# Altium PCB Snow LanteRn.PcbDoc
Units mm, origin at the board's own origin, x right, y up, seen from the top; angles counter-clockwise.
Board outline 48 x 65.97 mm, 2 copper layers (Top Layer, Bottom Side), stack 1.106 mm thick; 27 components, 19 nets, 55 pads, 0 vias.
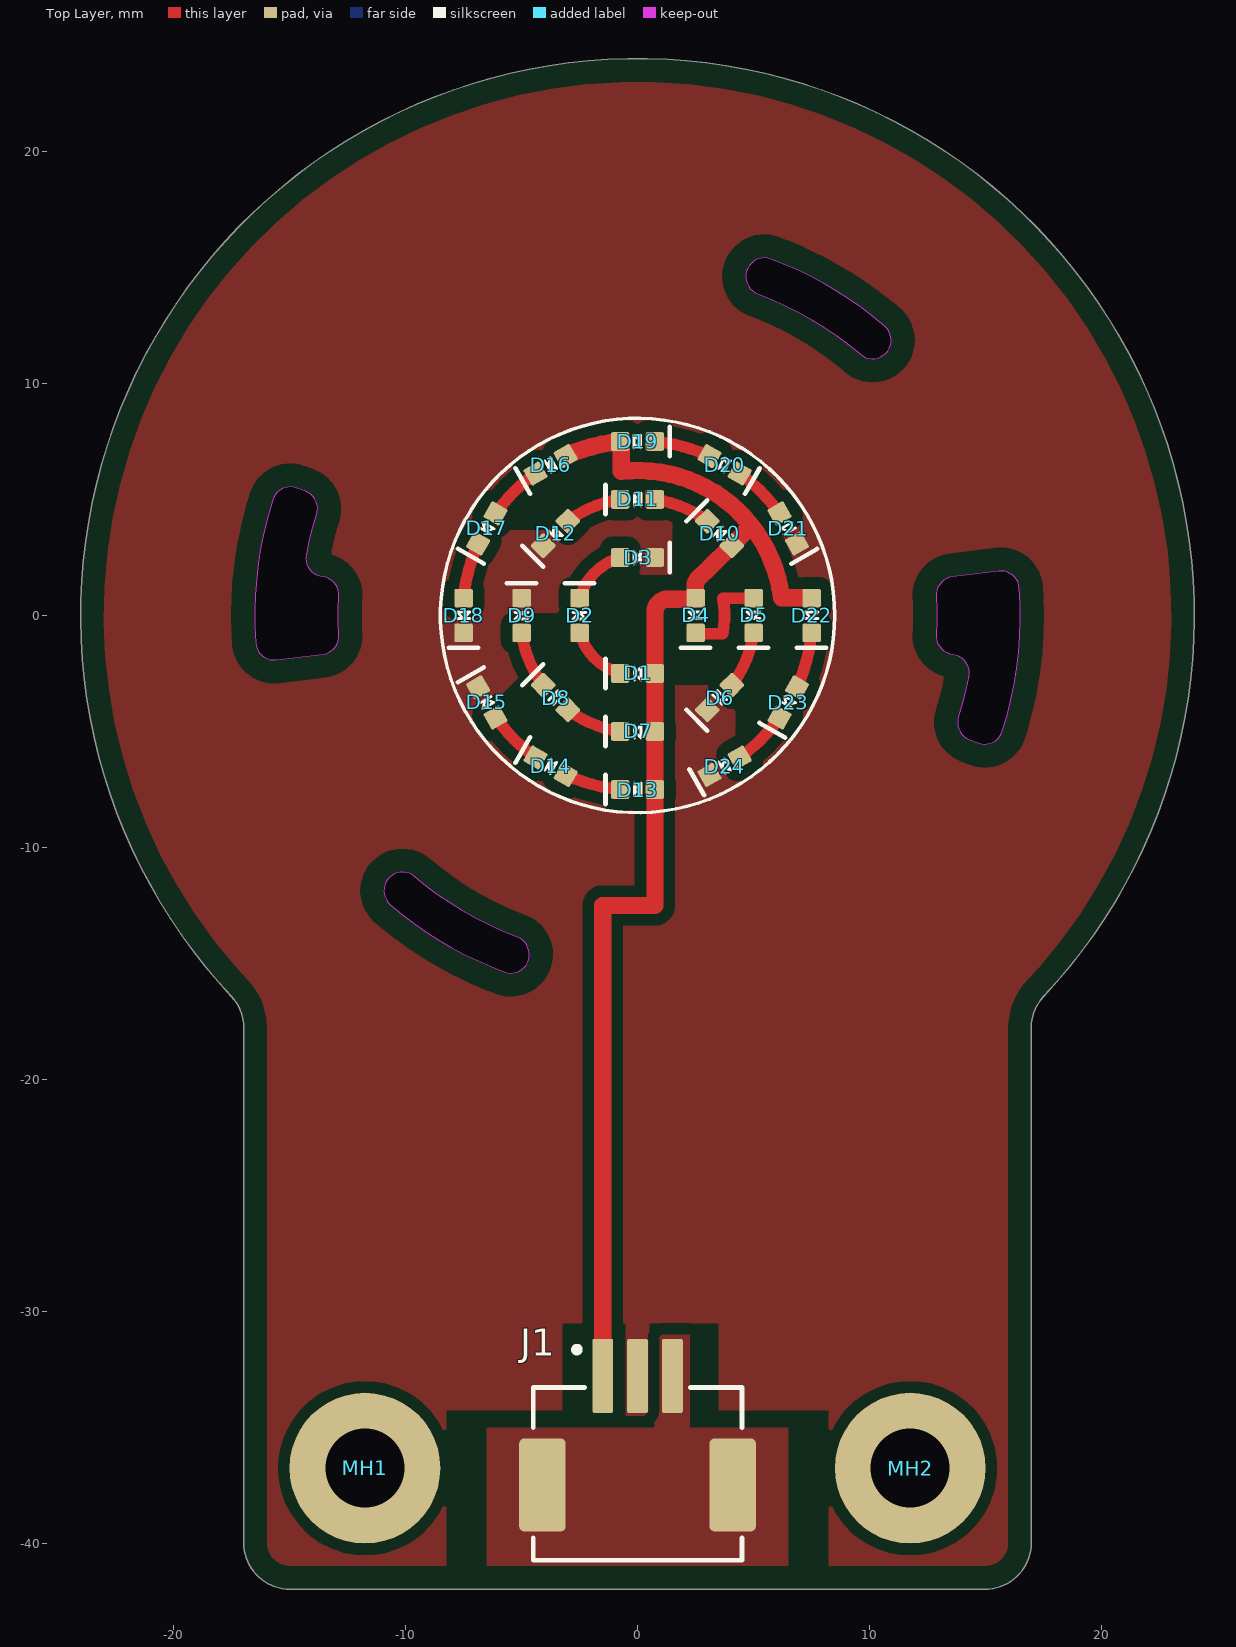
[diagram p0: Top Layer view]
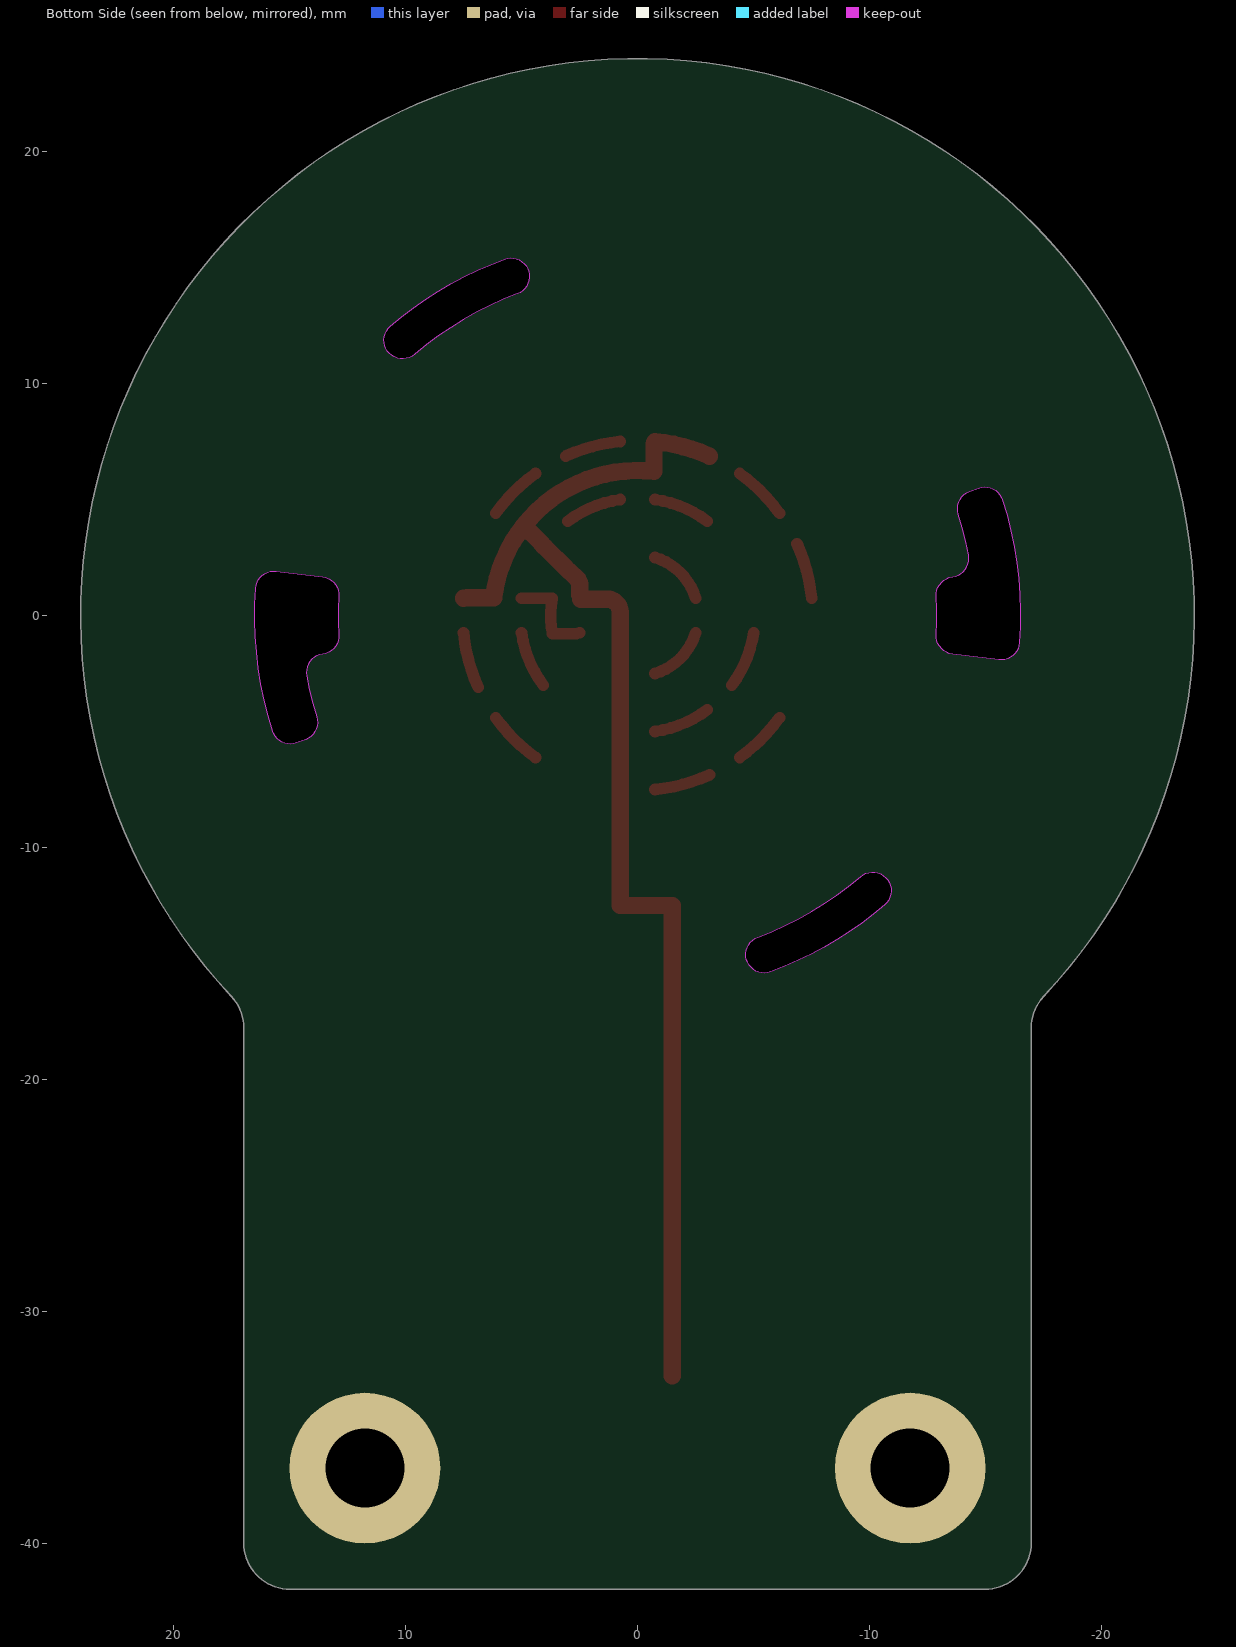
[diagram p1: Bottom Side view, seen from below]
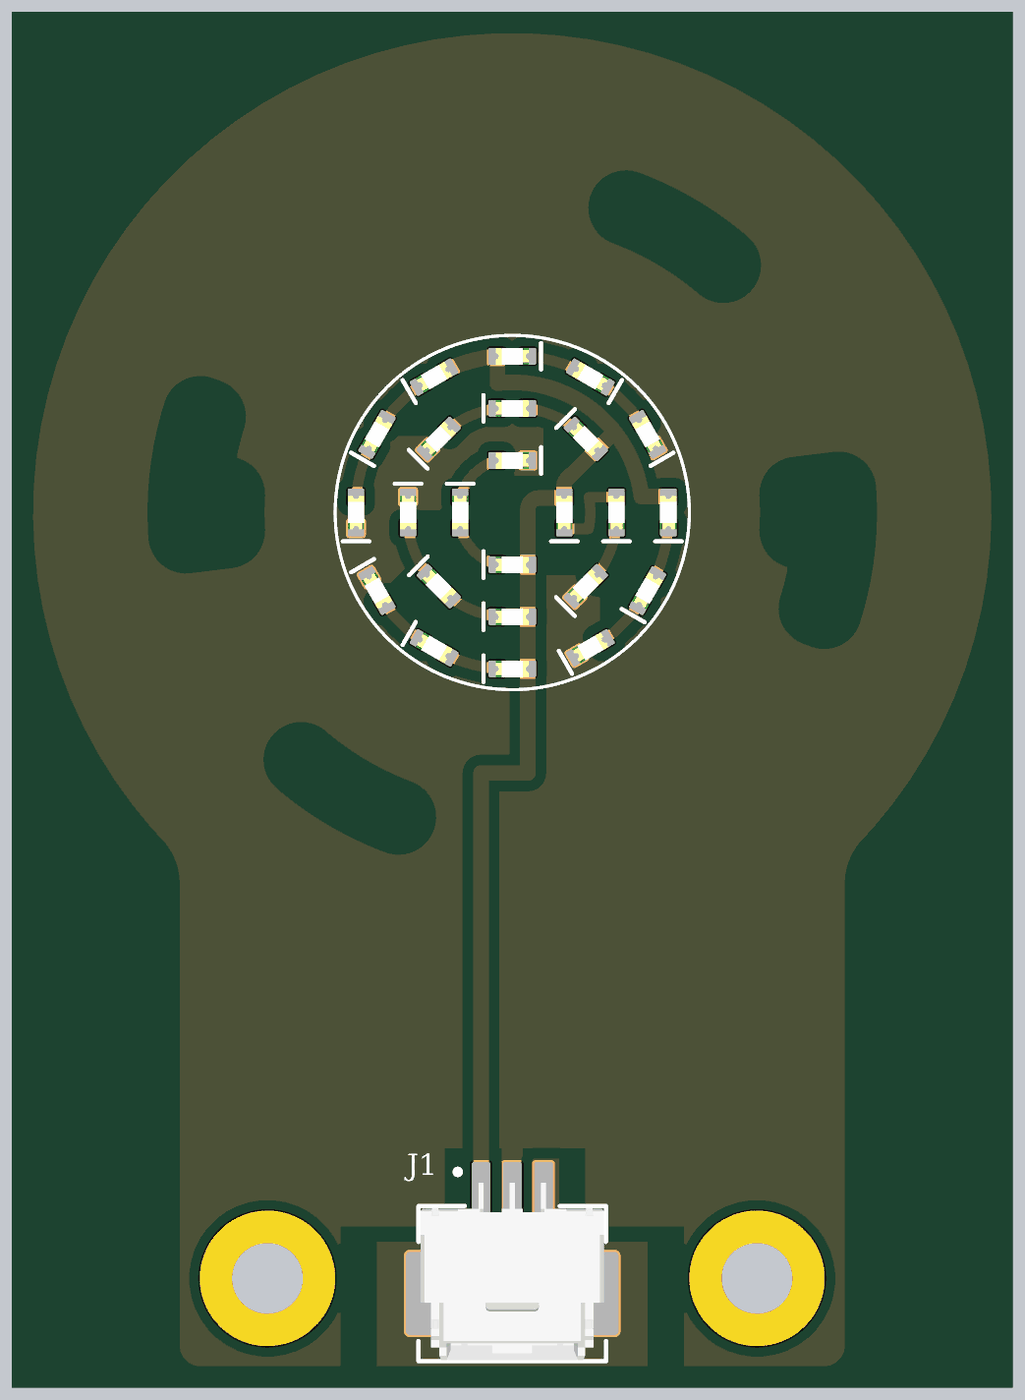
[diagram p2: 3D render of the assembled board from above, using the file's embedded part models]

## Layer stack, top to bottom
Top Solder: solder mask 0.0102, Solder Resist, Dk 3.5
Top Layer: signal copper 0.0356
Dielectric 1: core 0.1, Composite dielectric, Dk 4.5
Aluminum: core 0.97, Core-009, Dk 4.5
Bottom Side: signal copper (thickness not stored)

## Board outline
-16.971,-39.97 -16.971,-17.779 ccw(c-18.97,-17.779) -17.511,-16.412 cw(c0,0) 17.511,-16.412 ccw(c18.971,-17.779) 16.971,-17.779 16.971,-39.97 cw(c14.971,-39.97) 14.971,-41.97 -14.971,-41.97 cw(c-14.971,-39.97)
cut-out: 5.183,13.863 cw(c0,0) 9.612,11.254 ccw(c10.131,11.863) 10.651,12.471 ccw(c0,0) 5.743,15.362 ccw(c5.463,14.612)
cut-out: 12.874,-0.822 ccw(c13.672,-0.872) 13.575,-1.667 cw(c13.477,-2.461) 14.264,-2.604 cw(c0,0) 13.829,-4.361 ccw(c14.592,-4.601) 14.311,-5.351 14.687,-5.491 ccw(c14.967,-4.742) 15.729,-4.983 ccw(c0,0) 16.458,1.174 ccw(c15.66,1.117) 15.563,1.911 13.575,1.667 ccw(c13.672,0.873) 12.874,0.822 cw(c0,0)
cut-out: -16.458,-1.173 ccw(c-15.66,-1.117) -15.563,-1.911 -13.575,-1.667 ccw(c-13.672,-0.872) -12.874,-0.822 cw(c0,0) -12.874,0.822 ccw(c-13.672,0.873) -13.575,1.667 cw(c-13.477,2.461) -14.264,2.605 cw(c0,0) -13.829,4.361 ccw(c-14.592,4.602) -14.311,5.351 -14.687,5.491 ccw(c-14.967,4.742) -15.729,4.984 ccw(c0,0)
cut-out: -10.651,-12.47 ccw(c0,0) -5.743,-15.361 ccw(c-5.463,-14.612) -5.183,-13.863 cw(c0,0) -9.612,-11.254 ccw(c-10.131,-11.862)

## Design rules (kind name [scope] priority, off if disabled: settings)
BoardOutlineClearance [All] p1: gap=1 ignorepadtopadclearanceinfootprint=FALSE
Clearance [All] p1: gap=0.5 ignorepadtopadclearanceinfootprint=FALSE except(0.15: Arc-Arc Arc-Track Arc-SMDPad Arc-THPad Arc-Via Arc-Text Track-Track Track-SMDPad Track-THPad Track-Via Track-Text SMDPad-SMDPad SMDPad-THPad SMDPad-Via SMDPad-Text THPad-THPad THPad-Via THPad-Text Via-Via Via-Text Text-Text; 0.25: Arc-Hole Track-Hole SMDPad-Hole THPad-Hole Via-Hole Text-Hole)
ComponentClearance [All] p1: gap=0.127 collisioncheckmode=3 verticalgap=0.127 showdistances=TRUE
DiffPairsRouting [All] p1: maxlimit=0.254 minlimit=0.127 mostfreqgap=0.127 toplayer_minwidth=0.127 toplayer_maxwidth=25.4 toplayer_prefwidth=0.127 bottomlayer_minwidth=0.127 bottomlayer_maxwidth=25.4 bottomlayer_prefwidth=0.127 substack1={27A5C15A-25FC-4883-8667-F89D7865D495} toplayer_{27a5c15a-25fc-4883-8667-f89d7865d495}_minwidth=0.381 toplayer_{27a5c15a-25fc-4883-8667-f89d7865d495}_maxwidth=0.381 toplayer_{27a5c15a-25fc-4883-8667-f89d7865d495}_prefwidth=0.381 bottomlayer_{27a5c15a-25fc-4883-8667-f89d7865d495}_minwidth=0.381 bottomlayer_{27a5c15a-25fc-4883-8667-f89d7865d495}_maxwidth=0.381 bottomlayer_{27a5c15a-25fc-4883-8667-f89d7865d495}_prefwidth=0.381 maxuncoupledlength=12.7
Height [All] p1: minheight=0 maxheight=1816.048 prefheight=12.7
HoleSize [All] p1: absolutevalues=TRUE maxlimit=6.3 minlimit=1.6 maxpercent=80.000 minpercent=20.000
HoleToHoleClearance [All] p1: gap=0.25 allowstackedmicrovias=FALSE
MinimumAnnularRing [All] p1: minimumring=0.076
MinimumSolderMaskSliver [All] p1: minsoldermaskwidth=0
PlaneClearance [All] p1: clearance=0.127
PlaneConnect PlaneConnectPowerPads [InPadClass('PowerPads')] p1: planeconnectstyle=Direct reliefexpansion=0.508 reliefentries=4 reliefconductorwidth=0.254 reliefairgap=0.254
PlaneConnect [All] p2: pad.planeconnectstyle=Relief pad.reliefexpansion=0.3 pad.reliefentries=4 pad.reliefconductorwidth=0.127 pad.reliefairgap=0.127 via.planeconnectstyle=Direct via.reliefexpansion=0.3 via.reliefentries=4 via.reliefconductorwidth=0.127 via.reliefairgap=0.127
PolygonConnect PolygonConnectPowerPads [All vs (InPadClass('PowerPads'))] p1: connectstyle=Direct reliefconductorwidth=0.254 reliefentries=4 polygonreliefangle="90 Angle" airgapwidth=0.254
PolygonConnect [All] p2: thpad.connectstyle=Relief thpad.reliefconductorwidth=0.127 thpad.reliefentries=4 thpad.polygonreliefangle="90 Angle" thpad.airgapwidth=0.127 smdpad.connectstyle=Direct smdpad.reliefconductorwidth=0.127 smdpad.reliefentries=4 smdpad.polygonreliefangle="90 Angle" smdpad.airgapwidth=0.127 via.connectstyle=Direct via.reliefconductorwidth=0.127 via.reliefentries=4 via.polygonreliefangle="90 Angle" via.airgapwidth=0.127
RoutingVias [All] p1: holewidth=0.3 width=0.6 viastyle="Through Hole" minholewidth=0.3 minwidth=0.6 maxholewidth=0.6 maxwidth=6.6
SilkToSilkClearance [All] p1: silktosilkclearance=0
SilkToSolderMaskClearance [IsPad] p1: minsilkscreentomaskgap=0.127 clearancetoexposedcopper=TRUE
SolderMaskExpansion [All] p1: expansion=0.075 istentingtop=FALSE
SupplyNets "Schematic Supply Nets_1" [InNet('GND')] p1: voltage=0.000
SupplyNets "Schematic Supply Nets" [InNet('12V')] p2: voltage=0.000
Width [All] p1: maxlimit=25.4 minlimit=0.127 preferedwidth=0.127 substack1={27A5C15A-25FC-4883-8667-F89D7865D495} toplayer_{27a5c15a-25fc-4883-8667-f89d7865d495}_minwidth=0.1 toplayer_{27a5c15a-25fc-4883-8667-f89d7865d495}_maxwidth=2.54 toplayer_{27a5c15a-25fc-4883-8667-f89d7865d495}_prefwidth=0.3 bottomlayer_{27a5c15a-25fc-4883-8667-f89d7865d495}_minwidth=0.254 bottomlayer_{27a5c15a-25fc-4883-8667-f89d7865d495}_maxwidth=0.254 bottomlayer_{27a5c15a-25fc-4883-8667-f89d7865d495}_prefwidth=0.254 minimp=50.000000 maximp=50.000000 favimp=50.000000
20 further rules are at their usual default settings.

## Components (designator, comment, footprint, x,y, rotation, side; value= is the part's Value field where it differs from the comment)
D1 "LED_WHITE_0603" LED_0603 0,-2.5 r180 top
D2 "LED_WHITE_0603" LED_0603 -2.5,0 r90 top
D3 "LED_WHITE_0603" LED_0603 0,2.5 r0 top
D4 "LED_WHITE_0603" LED_0603 2.5,0 r270 top
D5 "LED_WHITE_0603" LED_0603 5,0 r270 top
D6 "LED_WHITE_0603" LED_0603 3.536,-3.536 r225 top
D7 "LED_WHITE_0603" LED_0603 0,-5 r180 top
D8 "LED_WHITE_0603" LED_0603 -3.536,-3.536 r135 top
D9 "LED_WHITE_0603" LED_0603 -5,0 r90 top
D10 "LED_WHITE_0603" LED_0603 3.536,3.536 r135 top
D11 "LED_WHITE_0603" LED_0603 0,5 r180 top
D12 "LED_WHITE_0603" LED_0603 -3.536,3.536 r225 top
D13 "LED_WHITE_0603" LED_0603 0,-7.5 r180 top
D14 "LED_WHITE_0603" LED_0603 -3.75,-6.495 r150 top
D15 "LED_WHITE_0603" LED_0603 -6.495,-3.75 r120 top
D16 "LED_WHITE_0603" LED_0603 -3.75,6.495 r210 top
D17 "LED_WHITE_0603" LED_0603 -6.495,3.75 r240 top
D18 "LED_WHITE_0603" LED_0603 -7.5,0 r270 top
D19 "LED_WHITE_0603" LED_0603 0,7.5 r0 top
D20 "LED_WHITE_0603" LED_0603 3.75,6.495 r330 top
D21 "LED_WHITE_0603" LED_0603 6.495,3.75 r300 top
D22 "LED_WHITE_0603" LED_0603 7.5,0 r270 top
D23 "LED_WHITE_0603" LED_0603 6.495,-3.75 r240 top
D24 "LED_WHITE_0603" LED_0603 3.75,-6.495 r210 top
J1 "CON_3M_SM_RA" MOLEX-5025850370 0,-37 r0 top
MH1 "MOUNTING_HOLE_M3" MOUNTING_HOLE_3mm -11.75,-36.75 r0 top
MH2 "MOUNTING_HOLE_M3" MOUNTING_HOLE_3mm 11.75,-36.75 r0 top

## Footprints (in the part's own frame and the unit in brackets; to place one, negate y for a bottom-side part, rotate by r counter-clockwise, add the part's x,y. Pads: shape width x height; smd on the part's side, far side on the other; paste and mask are expansions set on the pad)
LED_0603 [mm] "SMD, 2-Leads, Body 2x1.25mm"
  rrect20% 0.8x0.8 smd: 1(0.75,0) 2(-0.75,0)
  silkscreen extent -0.15,-0.63 1.38,0.64, body extent -0.8,-0.4 0.8,0.4, height 0.6
MOLEX-5025850370 [mm]
  rrect20% 2x4 smd paste+0 mask+0.1: 0(-4.1,-0.475) 0(4.1,-0.475)
  rrect20% 0.9x3.2 smd paste+0 mask+0.1: 1(-1.5,4.225) 2(0,4.225) 3(1.5,4.225)
  silkscreen extent -4.5,-3.72 4.5,5.48, body extent -4.4,-3.67 4.4,4.83, height 6.4
MOUNTING_HOLE_3mm [mm] "3mm Hole"
  round 6.5 hole 3.4: 0(0,0)

## Part data
D1 D2 D3 D4 D5 D6 D7 D8 D9 D10 D11 D12 D13 D14 D15 D16 D17 D18 D19 D20 D21 D22 D23 D24: "LED WHITE FROSTED-LENS 0603 SMD", Forward Voltage Drop=3.5V, Manufacturer 1=MEIHUA, Manufacturer Part Number 1=MHP1016UWDT, Package/Footprint=0603, Supplier Part Number 1=C409776, Mounting Type=SMD, Supplier 1=LCSC
J1: "CONN RCPT 3POS 0.059 TIN SMD R/A", Current Rating=2A, Manufacturer 1=Molex, Manufacturer Part Number 1=5025850370, Package/Footprint=SMD, Supplier Part Number 1=WM12831CT-ND, Voltage Rating=100V, Family=CLIK-Mate, Mounting Type=SMD, Orientation="Right Angle", Pitch=1.5mm, Supplier 1=Digi-Key

## Nets (pads, with @x,y where several pads share a name; then routed paths per layer and width w, separated by ;. In a path a pad name is that pad's centre, name@x,y a point inside that pad or via, vN(x,y) a via of type N, cw(c..) or ccw(c..) an arc to the next point about the centre after c; other vN are vias at no path point)
12V: D1.2 D4.2 D7.2 D10.2 D13.2 D16.2 D19.2 D22.2 J1.1 | length 56.2
  Top Layer w0.75: D16.2 cw(c0,0) D19.2 -0.708,7.35 -0.708,6.21 cw(c0,0) 4.906,3.873 ; J1.1 -1.5,-12.5 0.75,-12.5 D13.2 0.75,-5.15 D7.2 0.75,-4.85 0.75,-3.677 0.75,-2.65 D1.2 0.75,0.15 cw(c1.3,0.15) 1.3,0.7 2.45,0.7 2.46,0.757 2.487,0.9 2.487,1.271 cw(c2.987,1.271) 2.645,1.636 3.12,2.08 3.95,2.909 D10.2 4.158,3.125 4.906,3.873 ; D22.2 7.35,0.762 6.203,0.762 ccw(c0,0) 4.906,3.873
GND: J1.0 J1.3
NetD1_1: D1.1 D2.2 | length 2.6
  Top Layer w0.5: D2.2 ccw(c0,0) D1.1
NetD2_1: D2.1 D3.2 | length 2.6
  Top Layer w0.5: D2.1 cw(c0,0) D3.2
NetD4_1: D4.1 D5.2 | length 4
  Top Layer w0.5: D4.1 2.65,-0.786 3.667,-0.786 ccw(c0,0) 3.677,0.735 4.85,0.735 D5.2
NetD5_1: D5.1 D6.2 | length 2.5
  Top Layer w0.5: D6.2 ccw(c0,0) D5.1
NetD7_1: D7.1 D8.2 | length 2.5
  Top Layer w0.5: D8.2 ccw(c0,0) D7.1
NetD8_1: D8.1 D9.2 | length 2.5
  Top Layer w0.5: D9.2 ccw(c0,0) D8.1
NetD10_1: D10.1 D11.2 | length 2.5
  Top Layer w0.5: D11.2 cw(c0,0) D10.1
NetD11_1: D11.1 D12.2 | length 2.5
  Top Layer w0.5: D12.2 cw(c0,0) D11.1
NetD13_1: D13.1 D14.2 | length 2.4
  Top Layer w0.5: D14.2 ccw(c0,0) D13.1
NetD14_1: D14.1 D15.2 | length 2.4
  Top Layer w0.5: D15.2 ccw(c0,0) D14.1
NetD16_1: D16.1 D17.2 | length 2.4
  Top Layer w0.5: D17.2 cw(c0,0) D16.1
NetD17_1: D17.1 D18.2 | length 2.4
  Top Layer w0.5: D18.2 cw(c0,0) D17.1
NetD19_1: D19.1 D20.2 | length 2.4
  Top Layer w0.5: D19.1 cw(c0,0) D20.2
NetD20_1: D20.1 D21.2 | length 2.4
  Top Layer w0.5: D20.1 cw(c0,0) D21.2
NetD22_1: D22.1 D23.2 | length 2.4
  Top Layer w0.5: D23.2 ccw(c0,0) D22.1
NetD23_1: D23.1 D24.2 | length 2.4
  Top Layer w0.5: D24.2 ccw(c0,0) D23.1
WHITE_LED_CATHODE: D3.1 D6.1 D9.1 D12.1 D15.1 D18.1 D21.1 D24.1 J1.2
pads on no net: MH1.0 MH2.0

## Polygon pours and split planes (outlines as drawn)
WHITE_LED_CATHODE on Top Layer "CATHODE_L01_P002" (solid, pour order 2): -0.5,-30.5 -0.5,-34.5 0.5,-34.5 0.5,-30.5 3.5,-30.5 3.5,-34.25 8.25,-34.25 8.25,-41.97 14.971,-41.97 ccw(c14.971,-39.97) 16.971,-39.97 16.971,-17.779 cw(c18.971,-17.779) 17.511,-16.412 ccw(c0,0) -17.511,-16.412 cw(c-18.97,-17.779) -16.971,-17.779 -16.971,-39.97 ccw(c-14.971,-39.97) -14.971,-41.97 -8.25,-41.97 -8.25,-34.25 -3.25,-34.25 -3.25,-30.5
GND on Top Layer "GND_L01_P-001" (solid, pour order 1): -6.5,-41.97 -6.5,-35 0.75,-35 0.75,-31 2.25,-31 2.25,-35 6.5,-35 6.5,-41.97

## Other copper
Top Layer:
  pour cut-out: 1.5,4.25 0.891,4.859 -1.391,4.859 -2.583,3.667 -5.491,3.667 -5.491,5.009 -3.75,6.75 1.5,6.75 4.25,4 4.25,1.25 7,1.25 7,-3 4.829,-5.171 4.221,-5.171 4.221,-2.971 3.875,-2.625 3.5,-3 1,-3 0,-4 0,-7 -3.25,-7 -5.85,-4.4 -5.85,-3.391 -4.5,-2.041 -4.5,-1.5 -4.454,-1.454 -4.454,0.116 -3.134,0.116 -1.5,1.75 1.5,1.75

## Silkscreen, mask and mechanical layers (free items; w line width, h text height)
Top Overlay:
  circle w0.15: c0,0 r8.5
Mechanical 1:
  lines w0.2: -17.511,-16.412 cw(c0,0) 17.511,-16.412 ; -17.511,-16.412 cw(c-18.971,-17.779) -16.971,-17.779 ; -17.511,-16.412 cw(c0,0) 17.511,-16.412 ; -17.511,-16.412 cw(c-18.971,-17.779) -16.971,-17.779 ; -16.971,-39.97 ccw(c-14.971,-39.97) -14.971,-41.97 ; -16.971,-39.97 ccw(c-14.971,-39.97) -14.971,-41.97 ; -16.971,-39.97 -16.971,-17.779 ; -16.458,-1.173 ccw(c-15.66,-1.117) -15.563,-1.911 ; -16.458,-1.173 cw(c0,0) -15.729,4.984 ; -16.458,-1.173 cw(c0,0) -15.729,4.984 ; -16.458,-1.173 ccw(c-15.66,-1.117) -15.563,-1.911 ; -15.729,4.984 cw(c-14.967,4.742) -14.687,5.491 ; -15.729,4.984 cw(c-14.967,4.742) -14.687,5.491 ; -15.563,-1.911 -13.575,-1.667 ; -15.563,-1.911 -13.575,-1.667 ; -14.971,-41.97 14.971,-41.97 ; -14.971,-41.97 14.971,-41.97 ; -14.687,5.491 -14.311,5.351 ; -14.687,5.491 -14.311,5.351 ; -14.311,5.351 cw(c-14.592,4.602) -13.829,4.361 ; -14.311,5.351 cw(c-14.592,4.602) -13.829,4.361 ; -14.264,2.605 cw(c0,0) -13.829,4.361 ; -14.264,2.605 ccw(c-13.477,2.461) -13.575,1.667 ; -14.264,2.605 cw(c0,0) -13.829,4.361 ; -14.264,2.605 ccw(c-13.477,2.461) -13.575,1.667 ; -13.575,-1.667 ccw(c-13.672,-0.872) -12.874,-0.822 ; -13.575,-1.667 ccw(c-13.672,-0.872) -12.874,-0.822 ; -13.575,1.667 cw(c-13.672,0.873) -12.874,0.822 ; -13.575,1.667 cw(c-13.672,0.873) -12.874,0.822 ; -12.874,-0.822 cw(c0,0) -12.874,0.822 ; -12.874,-0.822 cw(c0,0) -12.874,0.822 ; -10.651,-12.47 ccw(c0,0) -5.743,-15.361 ; -10.651,-12.47 cw(c-10.131,-11.862) -9.612,-11.254 ; -10.651,-12.47 ccw(c0,0) -5.743,-15.361 ; -10.651,-12.47 cw(c-10.131,-11.862) -9.612,-11.254 ; -9.612,-11.254 ccw(c0,0) -5.183,-13.863 ; -9.612,-11.254 ccw(c0,0) -5.183,-13.863 ; -5.743,-15.361 ccw(c-5.463,-14.612) -5.183,-13.863 ; -5.743,-15.361 ccw(c-5.463,-14.612) -5.183,-13.863 ; 5.183,13.863 cw(c0,0) 9.612,11.254 ; 5.183,13.863 cw(c5.463,14.612) 5.743,15.362 ; 5.183,13.863 cw(c0,0) 9.612,11.254 ; 5.183,13.863 cw(c5.463,14.612) 5.743,15.362 ; 5.743,15.362 cw(c0,0) 10.651,12.471 ; 5.743,15.362 cw(c0,0) 10.651,12.471 ; 9.612,11.254 ccw(c10.131,11.863) 10.651,12.471 ; 9.612,11.254 ccw(c10.131,11.863) 10.651,12.471 ; 12.874,-0.822 ccw(c13.672,-0.872) 13.575,-1.667 ; 12.874,-0.822 ccw(c0,0) 12.874,0.822 ; 12.874,-0.822 ccw(c13.672,-0.872) 13.575,-1.667 ; 12.874,-0.822 ccw(c0,0) 12.874,0.822 ; 12.874,0.822 cw(c13.672,0.873) 13.575,1.667 ; 12.874,0.822 cw(c13.672,0.873) 13.575,1.667 ; 13.575,-1.667 cw(c13.477,-2.461) 14.264,-2.604 ; 13.575,-1.667 cw(c13.477,-2.461) 14.264,-2.604 ; 13.575,1.667 15.563,1.911 ; 13.575,1.667 15.563,1.911 ; 13.829,-4.361 ccw(c0,0) 14.264,-2.604 ; 13.829,-4.361 ccw(c14.592,-4.601) 14.311,-5.351 ; 13.829,-4.361 ccw(c0,0) 14.264,-2.604 ; 13.829,-4.361 ccw(c14.592,-4.601) 14.311,-5.351 ; 14.311,-5.351 14.687,-5.491 ; 14.311,-5.351 14.687,-5.491 ; 14.687,-5.491 ccw(c14.967,-4.742) 15.729,-4.983 ; 14.687,-5.491 ccw(c14.967,-4.742) 15.729,-4.983 ; 14.971,-41.97 ccw(c14.971,-39.97) 16.971,-39.97 ; 14.971,-41.97 ccw(c14.971,-39.97) 16.971,-39.97 ; 15.563,1.911 cw(c15.66,1.117) 16.458,1.174 ; 15.563,1.911 cw(c15.66,1.117) 16.458,1.174 ; 15.729,-4.983 ccw(c0,0) 16.458,1.174 ; 15.729,-4.983 ccw(c0,0) 16.458,1.174 ; 16.971,-39.97 16.971,-17.779 ; 16.971,-17.779 cw(c18.971,-17.779) 17.511,-16.412 ; 16.971,-17.779 cw(c18.971,-17.779) 17.511,-16.412